# Altium PCB FTDI_FT232R_USB_To_UART.PcbDoc
Units mil, origin at the board's own origin, x right, y up, seen from the top; angles counter-clockwise.
Board outline 1500 x 625 mil, 2 copper layers (Top Layer, Bottom Layer), stack 61.8 mil thick; 15 components, 9 nets, 64 pads, 17 vias.
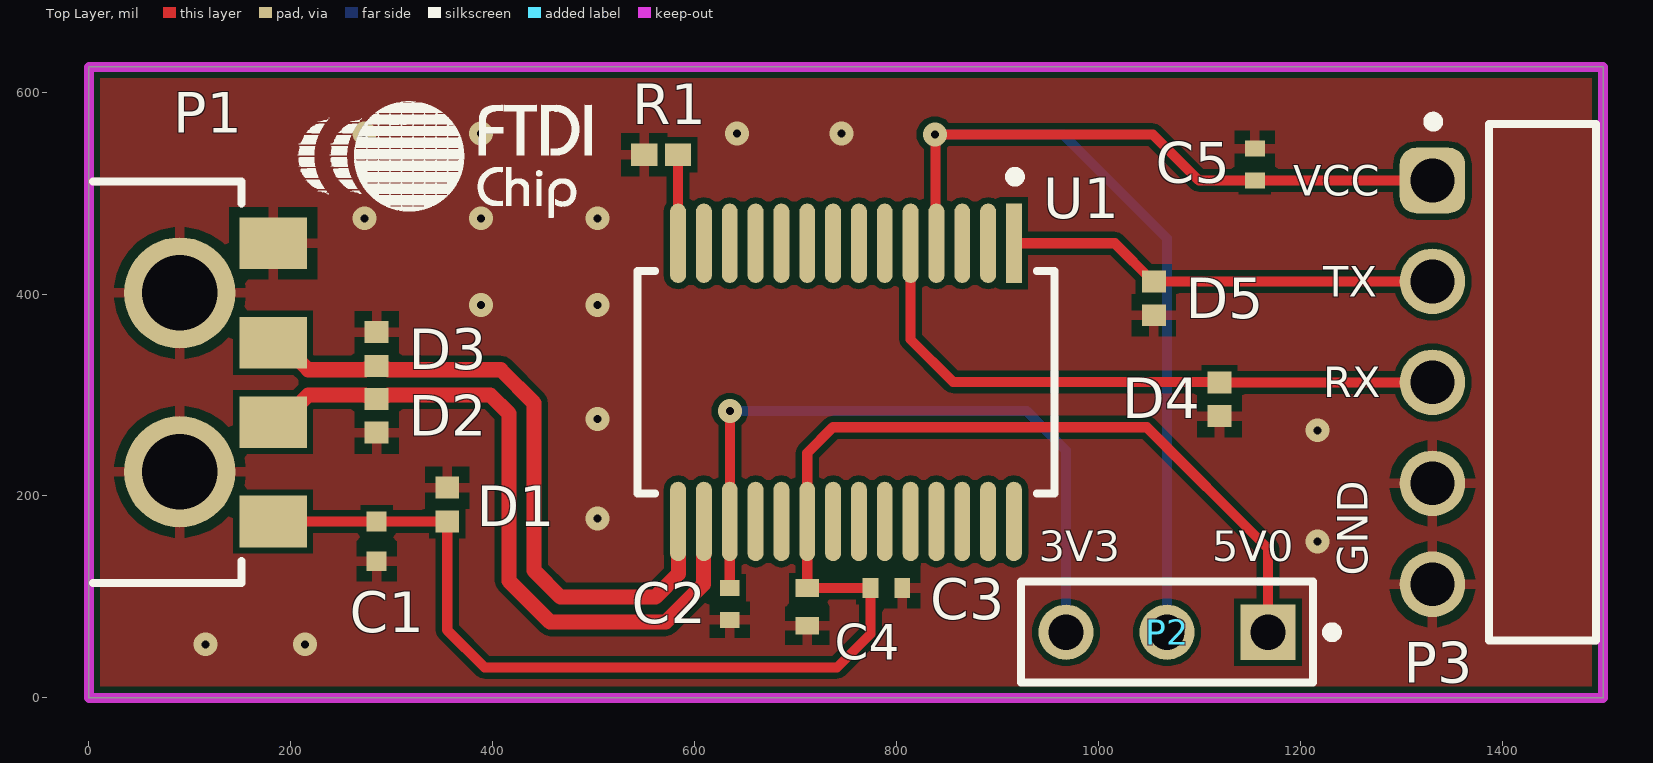
[diagram p0: Top Layer view]
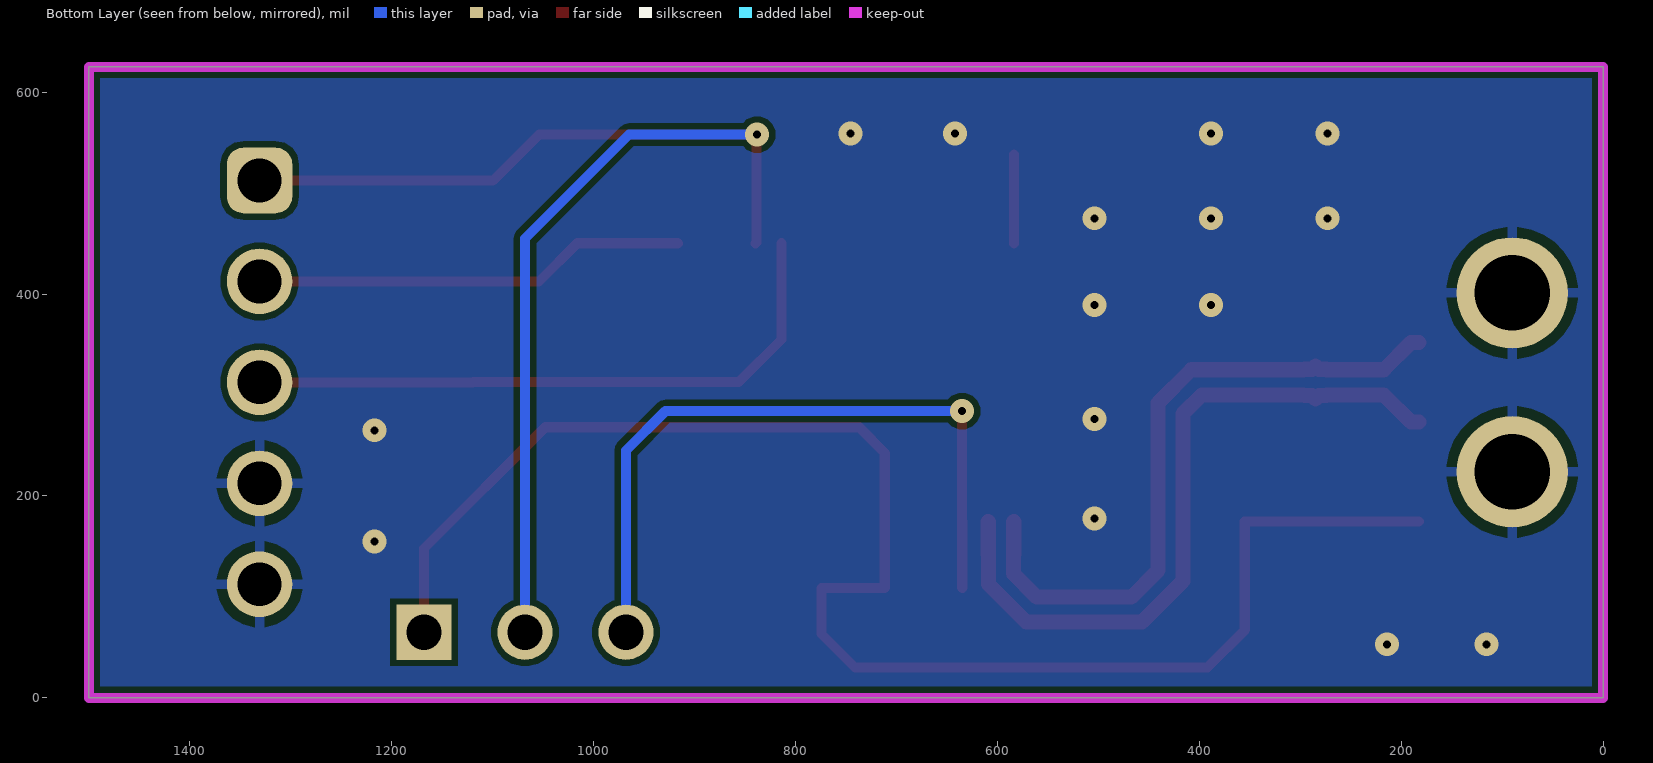
[diagram p1: Bottom Layer view, seen from below]
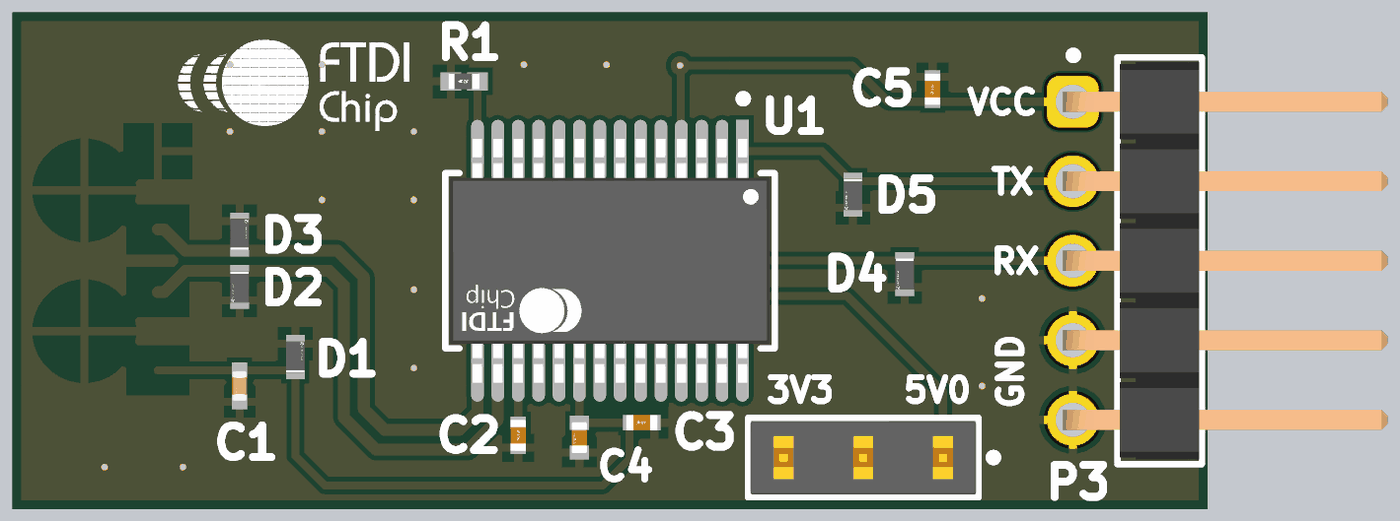
[diagram p2: 3D render of the assembled board from above, using the file's embedded part models]

## Layer stack, top to bottom
Top Solder: solder mask 0.4, Solder Resist, Dk 3.5
Top Layer: signal copper 1.4
Dielectric 1: dielectric 59, FR-4, Dk 4.8
Bottom Layer: signal copper 1.4
Bottom Solder: solder mask 0.4, Solder Resist, Dk 3.5

## Board outline
0,0 0,625 1500,625 1500,0

## Design rules (kind name [scope] priority, off if disabled: settings)
Clearance [All] p1: gap=6 ignorepadtopadclearanceinfootprint=FALSE
DiffPairsRouting [All] p1: maxlimit=10 minlimit=10 mostfreqgap=10 toplayer_minwidth=15 toplayer_maxwidth=15 toplayer_prefwidth=15 bottomlayer_minwidth=15 bottomlayer_maxwidth=15 bottomlayer_prefwidth=15 maxuncoupledlength=500
MinimumSolderMaskSliver [All] p1: minsoldermaskwidth=6
PolygonConnect [All] p1: thpad.connectstyle=Relief thpad.reliefconductorwidth=10 thpad.reliefentries=4 thpad.polygonreliefangle="90 Angle" thpad.airgapwidth=10 smdpad.connectstyle=Relief smdpad.reliefconductorwidth=10 smdpad.reliefentries=4 smdpad.polygonreliefangle="90 Angle" smdpad.airgapwidth=10 via.connectstyle=Direct via.reliefconductorwidth=10 via.reliefentries=4 via.polygonreliefangle="90 Angle" via.airgapwidth=10
RoutingVias RoutingVias_1 [All] p1: holewidth=47.24 width=47.24 viastyle="Through Hole" minholewidth=7.87 minwidth=15.75 maxholewidth=31.5 maxwidth=39.37
RoutingVias PowerVias [All] p2: holewidth=19.68 width=39.37 viastyle="Through Hole" minholewidth=19.68 minwidth=19.68 maxholewidth=19.68 maxwidth=39.37
SilkToSolderMaskClearance [IsPad] p1: minsilkscreentomaskgap=9 clearancetoexposedcopper=TRUE
SolderMaskExpansion [All] p1: expansion=3.94 istentingtop=FALSE
Width [All] p1: maxlimit=10 minlimit=10 preferedwidth=10
27 further rules are at their usual default settings.

## Classes and differential pairs
differential pair DATA: +DATA_P -DATA_N

## Components (designator, comment, footprint, x,y, rotation, side; value= is the part's Value field where it differs from the comment)
C1 "CC0402KPX7R7BB103" FP-CC0402-MFG 285,155.02 r270 top value="10 nF"
C2 "C1005X7R1C104K050BC" FP-C1005-050-0_05-MFG 634.84,93 r270 top
C3 "C1005X7R1C104K050BC" FP-C1005-050-0_05-MFG 790,108.75 r0 top
C4 "GRM155R61A475MEAAD" FP-GRM155-0_15-MFG 711.61,90.05 r270 top
C5 "C1005X7R1C104K050BC" FP-C1005-050-0_05-MFG 1155,528.25 r90 top
D1 "UCLAMP3601P.TNT" FP-SLP1006P2-MFG 355,191.44 r270 top
D2 "UCLAMP3601P.TNT" FP-SLP1006P2-MFG 285,279.4 r90 top
D3 "UCLAMP3601P.TNT" FP-SLP1006P2-MFG 285,345.6 r270 top
D4 "UCLAMP3601P.TNT" FP-SLP1006P2-MFG 1120,295.77 r90 top
D5 "UCLAMP3601P.TNT" FP-SLP1006P2-MFG 1055,395.77 r90 top
P1 "629004113921" 629004113921 -219.06,312.5 r270 top
P2 "87224-3" FP-87224-3-MFG 1068,65 r180 top
P3 "61300511021" 61300511021 1440,312.5 r90 top
R1 "CRG0402F10K" FP-CRG0402-IPC_B 566.88,538 r0 top
U1 "FT232RL-REEL" FP-SSOP-28-MFG 750,312.5 r270 top

## Footprints (in the part's own frame and the unit in brackets; to place one, negate y for a bottom-side part, rotate by r counter-clockwise, add the part's x,y. Pads: shape width x height; smd on the part's side, far side on the other; paste and mask are expansions set on the pad)
61300511021 [mm] "Pin Header, pitch 2.54 mm, THT, Angled, single row, 5p"
  rrect50% 1.65x1.65 hole 1.1: 1(5.08,2.77)
  round 1.65 hole 1.1: 2(2.54,2.77) 3(0,2.77) 4(-2.54,2.77) 5(-5.08,2.77)
  silkscreen extent -6.5,-1.35 6.68,2.87, body extent -6.35,-7.27 6.35,3.09, height 2.58
629004113921 [mm] "USB 2.0 Plug Type A SMT with Clip"
  rect 1.3x1.7 smd: 1(3.5,10.2) 2(1,10.2) 3(-1,10.2) 4(-3.5,10.2)
  round 2.8 hole 1.9: Shell(-2.25,7.85) Shell(2.25,7.85)
  silkscreen extent -5.05,5.66 5.05,9.4, body extent -6,-9.4 6,10.4, height 2.25
FP-87224-3-MFG [mil]
  rect 54.69x54.69 hole 35 paste-39370.1 mask+0: 1(-100,0)
  round 54.69 hole 35 paste-39370.1 mask+0: 2(0,0) 3(100,0)
  silkscreen extent -168,-50 145,50, body extent -148,-54 148,54, height 10
FP-C1005-050-0_05-MFG [mm]
  rect 0.4x0.5 smd paste+0 mask+0: 1(-0.4,0) 2(0.4,0)
  body extent -0.7,-0.38 0.7,0.38, height 0.25
FP-CC0402-MFG [mm]
  rect 0.5x0.5 smd paste+0 mask+0: 1(-0.5,0) 2(0.5,0)
  body extent -0.87,-0.48 0.87,0.48, height 0.25
FP-CRG0402-IPC_B [mil]
  rect 25.97x22.54 smd paste+0 mask+0: 1(-16.78,0) 2(16.78,0)
  body extent -36,-17 36,17, height 10
FP-GRM155-0_15-MFG [mm]
  rect 0.45x0.6 smd paste+0 mask+0: 1(-0.475,0) 2(0.475,0)
  body extent -0.8,-0.43 0.8,0.43, height 0.25
FP-SLP1006P2-MFG [mm]
  rect 0.55x0.6 smd paste+0 mask+0: 1(-0.425,0) 2(0.425,0)
  body extent -0.8,-0.45 0.8,0.45, height 0.25
FP-SSOP-28-MFG [mm]
  rect 2x0.4 smd paste+0 mask+0: 1(-3.5,4.225)
  rrect100% 2x0.4 smd paste+0 mask+0: 2(-3.5,3.575) 3(-3.5,2.925) 4(-3.5,2.275) 5(-3.5,1.625) 6(-3.5,0.975) 7(-3.5,0.325) 8(-3.5,-0.325) 9(-3.5,-0.975) 10(-3.5,-1.625) 11(-3.5,-2.275) 12(-3.5,-2.925) 13(-3.5,-3.575) 14(-3.5,-4.225) 15(3.5,-4.225) 16(3.5,-3.575) 17(3.5,-2.925) 18(3.5,-2.275) 19(3.5,-1.625) 20(3.5,-0.975) 21(3.5,-0.325) 22(3.5,0.325) 23(3.5,0.975) 24(3.5,1.625) 25(3.5,2.275) 26(3.5,2.925) 27(3.5,3.575) 28(3.5,4.225)
  silkscreen extent -5.3,-5.25 2.8,5.25, body extent -4.6,-5.55 4.6,5.55, height 0.25

## Part data
C1: library part CMP-03422-000420-1, "CC0402 10 nF X7R 10.00% 16 V", Capacitance="10 nF", Manufacturer=YAGEO, Package=CC0402, Temperature="-55°C to +125°C", Temperature Characteristic=X7R, Temperature Coefficient=30ppm/°C, Temperature Range High=+125°C, Temperature Range Low=-55°C, Tolerance=0.1, Voltage Rating="16 V", Automotive=No, Automotive Grade=NA, Category=Cap, ComponentLink2Description=Datasheet, ComponentLink2URL=http://www.yageo.com/documents/recent/UPY-GP_NP0_16V-to-50V_16.pdf, Device Class L1="Passive Components", Device Class L2=Capacitors, Device Class L3="Ceramic Capacitors", Footprint Url=http://www.yageo.com/exep/pages/download/literatures/UPY-C_GEN_24.pdf, Height=0.55mm, Ipc Land Pattern Name=CAPC10050X50, Lead Free=Yes, Manufacturer Part Number=CC0402KPX7R7BB103, Material=Ceramic, Mouser Description="Multilayer Ceramic Capacitors MLCC - SMD/SMT 10nF 16V X7R 10%", Octopart=https://octopart.com/cc0402kpx7r7bb103-yageo-12885102, RoHS=TRUE
C2 C3 C5: library part CMP-08246-004182-1, "Multilayer Ceramic Capacitors 100nF ±10% 16V X7R SMD 0402", Capacitance=100nF, Case Code (Imperial)=0402, Case Code (Metric)=1005, Dielectric=X7R, Dielectric Material=Ceramic, Max Operating Temperature=125°C, Min Operating Temperature=-55°C, Package Quantity=1, Tolerance=10%, Voltage=16V, Case/Package=0402, Construction=Flat, Depth=0.5mm, Height=0.5mm, Lead Free="Lead Free", Length=1mm, Mount="Surface Mount", Number of Pins=2, Packaging="Tape and Reel", Radiation Hardening=No, Resistor Type=Ceramic, RoHS Compliant=Yes, Series=C, Termination=SMD/SMT, Thickness=0.022inch, Voltage Rating=16V, Voltage Rating (DC)=16V, Weight=2.3E-05oz, Width=0.02inch
C4: library part CMP-06035-003573-1, "Chip Multilayer Ceramic Capacitors for General Purpose, 0402, 4.7uF, X5R, 15%, 20%, 10V", Capacitance=4.7uF, Case Code (Imperial)=0402, Case Code (Metric)=1005, Max Operating Temperature=85°C, Min Operating Temperature=-55°C, Tolerance=20%, Voltage Rating=10V, Case/Package=0402, Mount="Surface Mount", Packaging="Tape and Reel"
D1 D2 D3 D4 D5: library part CMP-56445-000005-1, "TVS DIODE 33VWM 60VC SLP1006P2", Case Code (Imperial)=0402, Case Code (Metric)=1006, Case/Package=SMD/SMT, Clamping Voltage=60V, Leakage Current=1uA, Max Breakdown Voltage=45V, Max Operating Temperature=125°C, Min Breakdown Voltage=36V, Min Operating Temperature=-40°C, Peak Pulse Current=2A, Peak Pulse Power=125W, Power Dissipation=170W, Power Line Protection=No, Resistor Type=Zener, Reverse Standoff Voltage=33V, Clamping Voltage-Max=60V, Depth=0.6mm, Diode Type=ZENER, Direction=Unidirectional, Element Configuration=Single, Lead Free="Lead Free", Length=1mm, Mount="Surface Mount", Number of Pins=2, Number of Unidirectional Channels=1, Packaging="Tape and Reel", Radiation Hardening=No, RoHS Compliant=Yes, Series="Automotive, AEC-Q100, uClamp®", Working Voltage=33V
P1: library part CMP-1502-03242-2, Contact Resistance=20mΩ, Current Rating=1.5A, Insulation Resistance=1GΩ, Max Operating Temperature=105°C, Min Operating Temperature=-40°C, Operating Supply Voltage=30V, Connector Type=USB, Contact Plating=Gold, Features=Shielded, Gender=Male, Lead Free="Lead Free", Length=18.8mm, Mount="Horizontal, Surface Mount", NexarPartId=19991169, Number of Contacts=4, Number of Pins=4, Orientation=Horizontal, REACH SVHC=Unknown, RoHS=Compliant, Termination=SMD/SMT, USB Standard="USB 2.0"
P2: library part CMP-2000-05697-2, "CONN HEADER VERT 3POS 2.54MM", Color=Black, Contact Current Rating=3A, Flammability Rating="UL94 V-0", High Temperature Housing=No, Max Operating Temperature=105°C, Min Operating Temperature=-65°C, Package Quantity=520, Approvals=CSA, Board Standoff="No (Without)", Connector Type=Plug, Contact Gender=Male, Contact Material=Bronze, Contact Mating Length=8.08mm, Contact Plating=Gold, Contact Post Length=0.125inch, Contact Protection="No (Without)", Contact Shape=Square, Contact Type="Male Pin", Current Rating=3A, Depth=2.54mm, ELV=Compliant, Gasket="No (Without)", High Speed Serial Data Connector=No, Housing Color=Black, Housing Material=Thermoplastic, Keyed=No, Lead Free="Lead Free", Length=7.21mm, Mating Alignment="No (Without)", Mating Connector Lock="No (Without)", Mount="Through Hole", Number of Contacts=3, Number of Positions=3, Number of Rows=1, Orientation=Straight, Packaging=Carton, PCB Mount Retention=Without, PCB Mounting Orientation=Vertical, PCB Thickness=1.397mm, Pitch=2.54mm, Radiation Hardening=No, RoHS Compliant=Yes, Row Spacing=2.54mm, Selectively Loaded="No (Without)", Series="AMPMODU MOD II", Stabilizers="No (Without)", Strain Relief="No (Without)", Termination="Through Hole"
P3: library part CMP-1502-01067-3, Color=Black, Contact Resistance=20mΩ, Current Rating=3A, Operating Supply Voltage=250V, Connector Type="Male Pin", Contact Material=Copper, Contact Mating Length=5.9944mm, Contact Plating=Gold, Gender=Male, Lead Pitch=2.54mm, Mount="Through Hole", NexarPartId=32855525, Number of Contacts=5, Number of Pins=5, Number of Positions=5, Number of Rows=1, Packaging=Bulk, Pitch=2.54mm, REACH SVHC=Unknown, RoHS=Compliant, Termination=Solder
R1: library part CMP-03211-011410-1, "RES SMD 10K OHM 1% 1/16W 0402", Case Code (Imperial)=0402, Max Operating Temperature=125°C, Max Power Dissipation=63mW, Min Operating Temperature=-55°C, Number of Resistors=1, Package Quantity=10000, Resistance=10kR, Resistance Tolerance=1%, Resistor Type="Thick Film", Temperature Coefficient=100ppm/°C, Voltage Rating=50V, Case/Package=0402, Construction=Rectangular, Depth=0.5mm, ELV=Compliant, Height=0.35mm, Lead Free="Lead Free", Length=1mm, Military Standard=Not, Mount="Surface Mount", Number of Terminations=2, Packaging="Tape and Reel", Power Rating=63mW, Radiation Hardening=No, REACH SVHC="No SVHC", RoHS Compliant=Yes, Series="CRG, Neohm", Technology="THICK FILM", Termination=Solder, Tolerance=1%, Voltage Rating (DC)=50V, Width=0.02inch
U1: library part CMP-0078-00029-4, "IC USB FS SERIAL UART 28-SSOP", Case/Package=SSOP, Max Operating Temperature=85°C, Max Supply Voltage=5.25V, Min Operating Temperature=-40°C, Min Supply Voltage=3.3V, Operating Supply Current=15mA, Package Quantity=2000, Voltage=5V, Data Rate=12Mbps, Height=1.75mm, Interface=UART, Lead Free="Lead Free", Length=10.2mm, Mount="Surface Mount", Number of Channels=1, Number of Pins=28, Number of Transceivers=1, Packaging="Tape and Reel", Radiation Hardening=No, REACH SVHC="No SVHC", Weight=0.080001oz, Width=5.3mm

## Via types
v1: diameter 23.62, hole 7.87, Top Layer to Bottom Layer, tented both sides, 17 vias

## Nets (pads, with @x,y where several pads share a name; then routed paths per layer and width w, separated by ;. In a path a pad name is that pad's centre, name@x,y a point inside that pad or via, vN(x,y) a via of type N, cw(c..) or ccw(c..) an arc to the next point about the centre after c; other vN are vias at no path point)
3V3: C2.1 P2.3 U1.17 | length 704.5
  Top Layer w10: C2.1 U1.17 634.92,174.78 634.92,283.92 v1(635,284)
  Bottom Layer w10: v1(635,284) 929,284 968,245 P2.3
DATA_N: D2.2 P1.2 U1.16 | length 709.1
  Top Layer w15: P1.2 190.39,273.13 217.26,300 273.49,300 274.04,299.46 281.67,299.46 D2.2 288.33,299.46 295.96,299.46 296.51,300 397.65,300 416,281.64 416,115.64 456.64,75 571.48,75 608.96,112.48 608.96,142.38 609.11,142.54 609.11,174.56 U1.16
DATA_P: D3.2 P1.3 U1.15 | length 667.7
  Top Layer w15: P1.3 190.39,351.87 217.26,325 273.49,325 274.04,325.54 281.67,325.54 D3.2 288.33,325.54 295.96,325.54 296.51,325 408,325 441,292 441,126 467,100 561.12,100 583.96,122.83 583.96,142.38 583.8,142.54 583.8,174.56 U1.15
GND: C1.2 C2.2 C3.2 C4.2 C5.2 D1.1 D2.1 D3.1 D4.1 D5.1 P1.4 P1.Shell P3.4 P3.5 R1.1
  other v1: 115.5,53 214,53 1217,155 503.83,177.66 1217,265 503.83,276.16 388.41,389 503.83,389 273,475 388.41,475 503.83,475 273,559 388.41,559 642,559 745.5,559
PWREN: R1.2 U1.14 | length 87.7
  Top Layer w10: U1.14 R1.2
RX: D4.2 P3.3 U1.5 | length 629.9
  Top Layer w10: U1.5 813.98,355.02 856,313 1119.5,313 D4.2 P3.3
TX: D5.2 P3.2 U1.1 | length 430.3
  Top Layer w10: U1.1 1016.22,450.3 1054.02,412.5 D5.2 P3.2
VBUS: C1.1 C3.1 C4.1 D1.2 P1.1 P2.1 U1.20 | length 1570.1
  Top Layer w10: P1.1 C1.1 D1.2 355,67 392,30 741,30 774.25,63.25 C3.1 C4.1 U1.20 711.61,242.61 737,268 1048,268 1168,148 P2.1
VCCIO: C5.1 P2.2 P3.1 U1.4 | length 1282.8
  Top Layer w10: U1.4 838.78,451.08 838.78,557.22 v1(838,558) 1054,558 1099.5,512.5 C5.1 P3.1
  Bottom Layer w10: v1(838,558) 965,558 1068,455 P2.2
pads on no net: U1.2 U1.3 U1.6 U1.7 U1.8 U1.9 U1.10 U1.11 U1.12 U1.13 U1.18 U1.19 U1.21 U1.22 U1.23 U1.24 U1.25 U1.26 U1.27 U1.28

## Polygon pours and split planes (outlines as drawn)
GND on Bottom Layer "GND_L02_P001" (solid, pour order 1): 0,0 0,625 1500,625 1500,0
GND on Top Layer "GND_L01_P000" (solid, remove dead copper, pour order 0): 0,0 0,625 1500,625 1500,0

## Keep-outs
Keep-Out Layer:
  the board outline again, w10

## Silkscreen, mask and mechanical layers (free items; w line width, h text height)
Top Overlay:
  drawing of 56 lines, arcs and shapes, not listed
  text "VCC" at 1193,497.5 h30
  text "TX" at 1222.99,397.5 h30
  text "RX" at 1222.99,297.5 h30
  text "3V3" at 941,135.5 h30
  text "5V0" at 1113,135.5 h30
  text "GND" at 1267,121 h30 r90

## Dimensions
1539.45,624.81 to 1539.45,-0.19 on Mechanical 1
-1,669 to 1499,669 on Mechanical 1

## Text inside footprints (layer, text, board x,y; h text height)
P1: Mechanical 2 "PCB Edge" at -39.92,391.24 h24 r270